# Altium PCB PCB.PcbDoc
Units mm, origin at the board's own origin, x right, y up, seen from the top; angles counter-clockwise.
Board outline 45 x 45 mm, 2 copper layers (Top Layer, Bottom Layer); 27 components, 24 nets, 97 pads, 5 vias.
Unrouted connection lines stored in the file: 42.
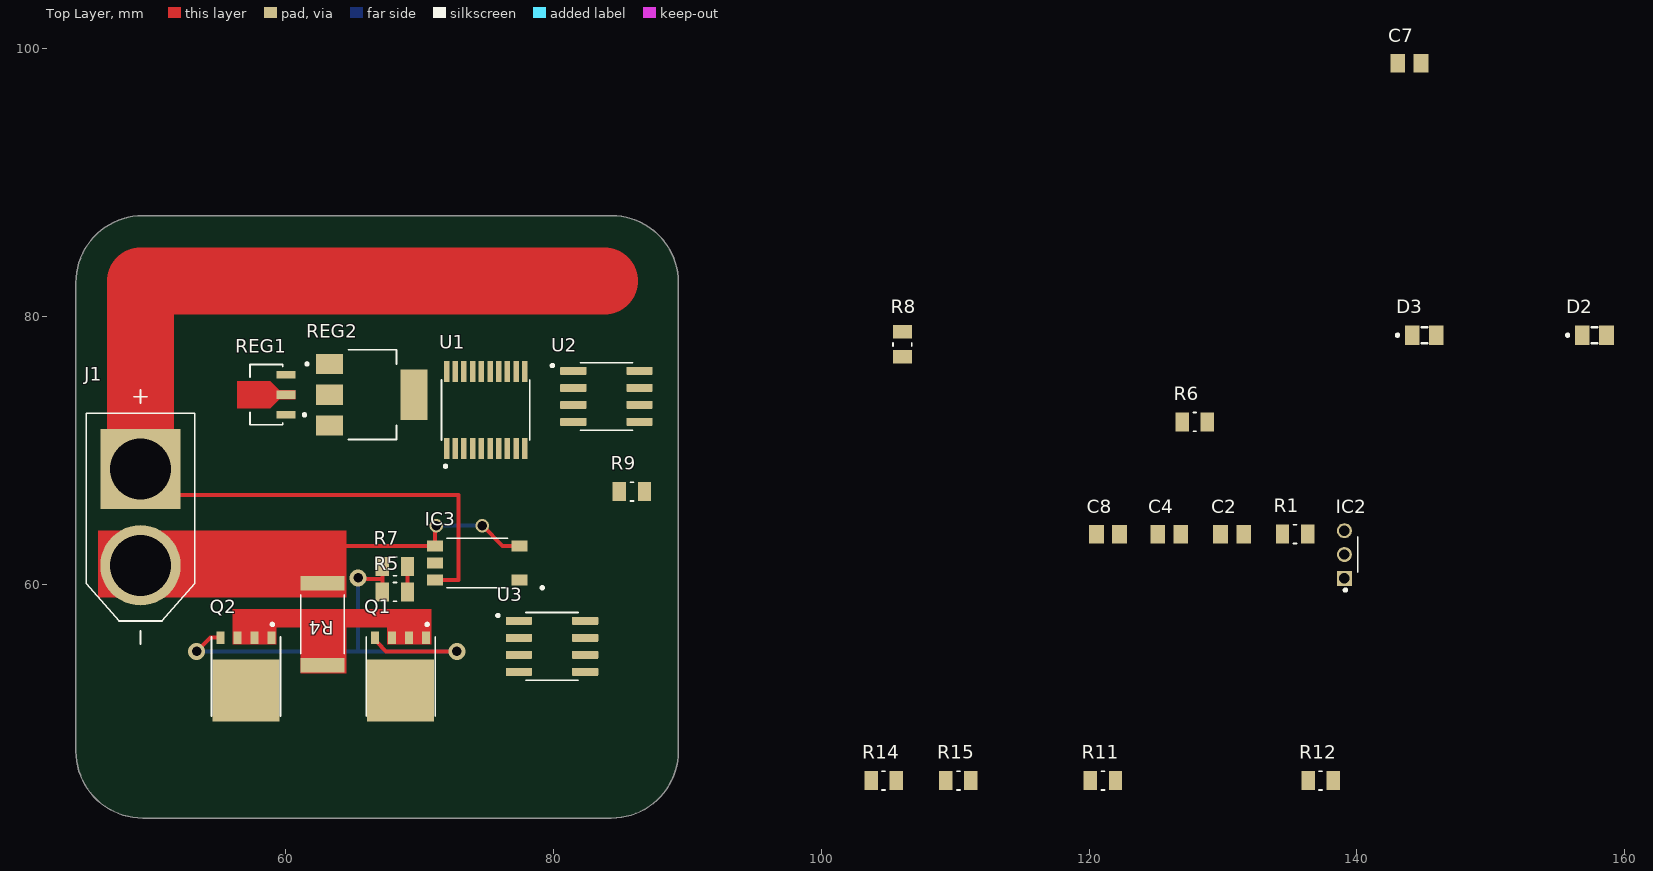
[diagram p0: Top Layer view]
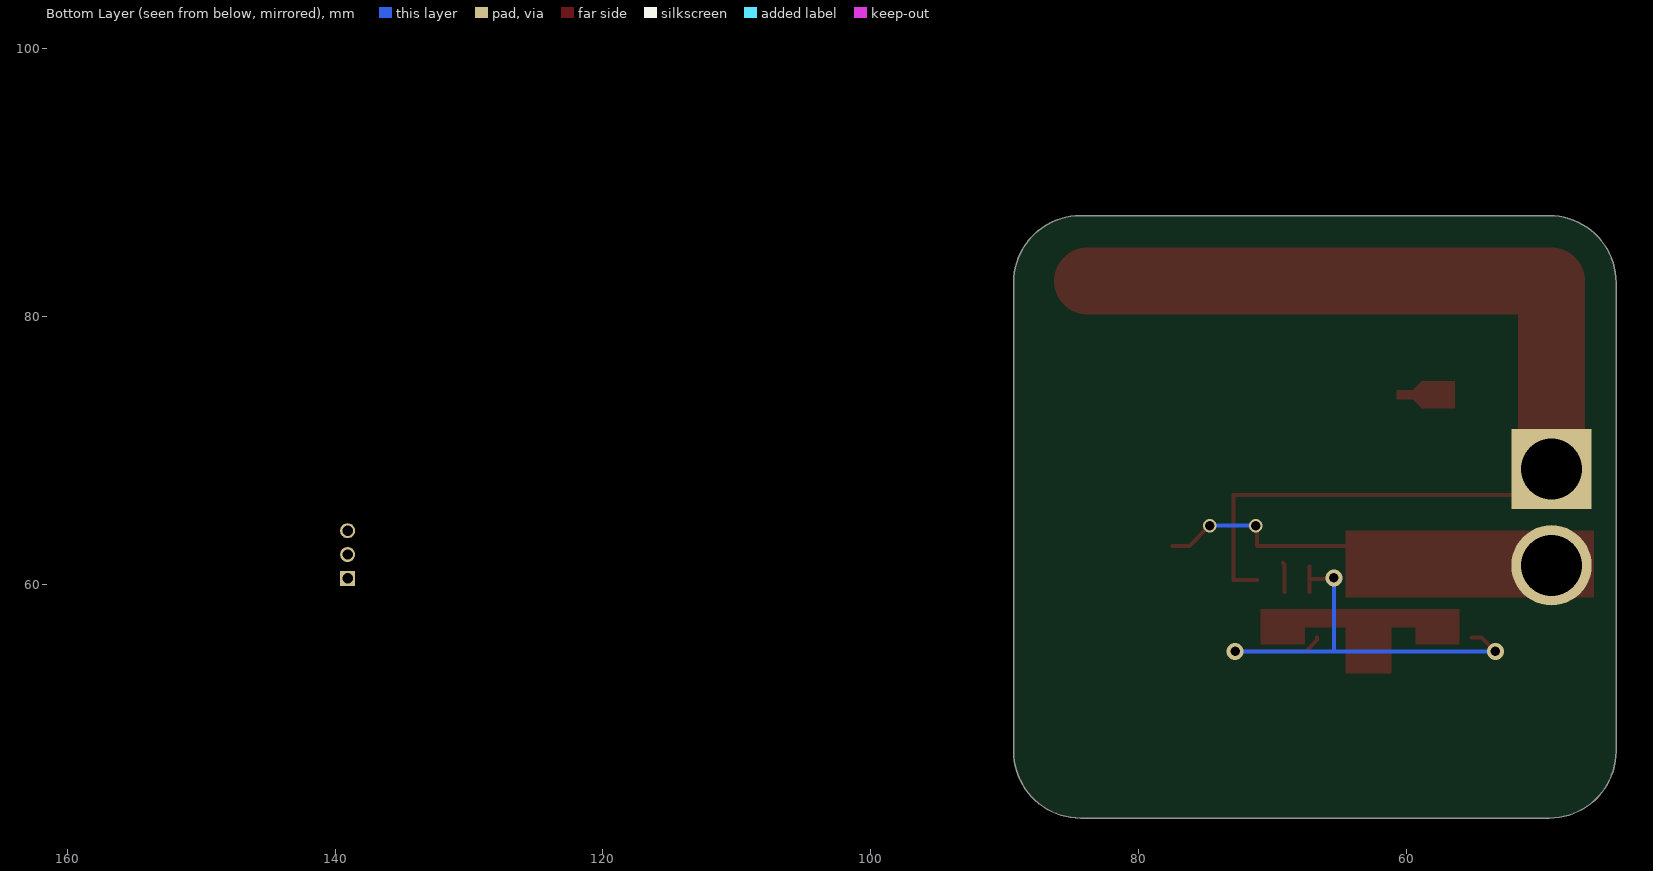
[diagram p1: Bottom Layer view, seen from below]

## Layer stack, top to bottom
Top Solder: solder mask 0.0102, Solder Resist, Dk 3.5
Top Layer: signal copper 0.0356
Dielectric 1: dielectric 0.32, FR-4, Dk 4.8
Bottom Layer: signal copper 0.0356
Bottom Solder: solder mask 0.0102, Solder Resist, Dk 3.5

## Board outline
44.323,47.545 44.323,82.545 cw(c49.323,82.545) 49.323,87.545 84.323,87.545 cw(c84.323,82.545) 89.323,82.545 89.323,47.545 cw(c84.323,47.545) 84.323,42.545 49.323,42.545 cw(c49.323,47.545)

## Design rules (kind name [scope] priority, off if disabled: settings)
Clearance [All] p1: gap=0.254 ignorepadtopadclearanceinfootprint=FALSE
PolygonConnect [All] p1: connectstyle=Relief reliefconductorwidth=0.254 reliefentries=4 polygonreliefangle="90 Angle" airgapwidth=0.254
RoutingVias [All] p1: holewidth=0.711 width=1.27 viastyle="Through Hole" minholewidth=0.711 minwidth=1.27 maxholewidth=0.711 maxwidth=1.27
SolderMaskExpansion [All] p1: expansion=0.102 istentingtop=FALSE
SupplyNets "Schematic Supply Nets" [InNet('GND')] p1: voltage=0.000
Width [All] p1: maxlimit=5 minlimit=0.254 preferedwidth=0.254
30 further rules are at their usual default settings.

## Components (designator, comment, footprint, x,y, rotation, side; value= is the part's Value field where it differs from the comment)
C2 "0.1uF" "0805 SMD CAP" 130.683,63.754 r0 top
C4 "0.22uF" "0805 SMD CAP" 125.984,63.754 r0 top
C7 "4.7nF" "0805 SMD CAP" 143.917,98.933 r0 top
C8 "100nF" "0805 SMD CAP" 121.412,63.754 r0 top
D2 "Red" "0805 SMD LED" 157.734,78.613 r0 top
D3 "Red" "0805 SMD LED" 145.034,78.613 r0 top
IC2 "US1881" UA 139.319,62.23 r90 top
IC3 "TLP152" SOIC-6 74.295,61.595 r180 top
J1 "XT60 Male" "XT60 Male Pin" 49.149,65.024 r270 top
Q1 "BSC032NE2LS" TDSON-8 68.58,53.12 r270 top
Q2 "BSC032NE2LS" TDSON-8 57.023,53.12 r270 top
R1 "10K" "0805 SMD RES" 135.382,63.754 r0 top
R4 "2512 SHUNT RESISTOR" "RES 2512 SMD" 62.738,57.023 r270 top
R5 "10R" "0805 SMD RES" 68.153,59.436 r180 top
R6 "220R" "0805 SMD RES" 127.889,72.136 r0 top
R7 "10R" "0805 SMD RES" 68.153,61.341 r180 top
R8 "500R" "0805 SMD RES" 106.045,77.932 r90 top
R9 "1K" "0805 SMD RES" 85.852,66.929 r0 top
R11 "1K" "0805 SMD RES" 121.031,45.339 r0 top
R12 "7K" "0805 SMD RES" 137.287,45.339 r0 top
R14 "10K" "0805 SMD RES" 104.648,45.339 r0 top
R15 "1K" "0805 SMD RES" 110.236,45.339 r0 top
REG1 "L78L05ABUTR SOT-89-3" SOT89-3 58.547,74.168 r180 top
REG2 "AMS1117" SOT-223 66.421,74.168 r0 top
U1 "STM8S103F3P6 TSSOP-20" TSSOP-20 74.93,73.025 r90 top
U2 "ISO1541DR" SOIC-8 83.947,74.041 r0 top
U3 "LM358 - SMD" SOIC-8 79.883,55.372 r0 top

## Footprints (in the part's own frame and the unit in brackets; to place one, negate y for a bottom-side part, rotate by r counter-clockwise, add the part's x,y. Pads: shape width x height; smd on the part's side, far side on the other; paste and mask are expansions set on the pad)
"0805 SMD CAP" [mm]
  rect 1.1x1.38 smd: 1(-0.863,0) 2(0.863,0)
  body extent -1,-0.72 1,0.72, height 1.22
"0805 SMD LED" [mm]
  rect 1.1x1.45 smd: A(0.9,0) C(-0.9,0)
  silkscreen extent -2.1,-0.6 0.2,0.6, body extent -1,-0.63 1,0.63, height 0.7
"0805 SMD RES" [mm]
  rect 1x1.42 smd: 1(-0.935,0) 2(0.935,0)
  silkscreen extent -0.12,-0.7 0.12,0.7, body extent -1,-0.63 1,0.63, height 0.6
"RES 2512 SMD" [mm]
  rect 1.07x3.27 smd: 1(-3.055,0) 2(3.055,0)
  silkscreen extent -2.2,-1.63 2.2,1.63, body extent -3.18,-1.6 3.18,1.6, height 0.65
SOIC-6 [mm]
  rect 1.2x0.8 smd: 1(-3.15,1.27) 3(-3.15,-1.27) 4(3.15,-1.27) 5(3.15,0) 6(3.15,1.27)
  silkscreen extent -4.96,-1.85 2.27,1.94, body extent -3.5,-1.85 3.5,1.85, height 2.3
SOIC-8 [mm]
  rrect25% 1.97x0.6 smd: 1(-2.47,1.905) 2(-2.47,0.635) 3(-2.47,-0.635) 4(-2.47,-1.905) 5(2.47,-1.905) 6(2.47,-0.635) 7(2.47,0.635) 8(2.47,1.905)
  silkscreen extent -4.14,-2.53 1.95,2.53, body extent -3,-2.45 3,2.45, height 1.75
SOT89-3 [mm]
  rect 1.4x0.57 smd: 1(-1.475,1.5) 3(-1.475,-1.5)
  rect 1.4x0.65 smd paste-2 mask+0: 2(-1.475,0)
  Top Layer region: 2.175,-1 -0.275,-1 -0.95,-0.325 -2.175,-0.325 -2.175,0.325 -0.95,0.325 -0.275,1 2.175,1
  silkscreen extent -2.95,-2.25 1.22,2.25, body extent -2.27,-2.25 1.83,2.25, height 1.6
SOT-223 [mm]
  rect 2x1.5 smd: 1(-3.15,2.3) 2(-3.15,0) 3(-3.15,-2.3)
  rect 2x3.8 smd: 4(3.15,0)
  silkscreen extent -4.94,-3.35 1.85,3.35, body extent -3.5,-3.23 3.5,3.22, height 1.8
TDSON-8 [mm]
  rect 0.95x0.6 smd paste-1 mask+0: 1(-2.9,1.905) 2(-2.9,0.635) 3(-2.9,-0.635) 4(-2.9,-1.905)
  rect 4.65x5 smd paste-3 mask+0: 5(1.05,0)
  silkscreen extent -3.99,-2.58 2.95,2.58, body extent -3.08,-2.58 3.08,2.58, height 1.1
TSSOP-20 [mm]
  rect 1.56x0.41 smd: 1(-2.88,2.925) 2(-2.88,2.275) 3(-2.88,1.625) 4(-2.88,0.975) 5(-2.88,0.325) 6(-2.88,-0.325) 7(-2.88,-0.975) 8(-2.88,-1.625) 9(-2.88,-2.275) 10(-2.88,-2.925) 11(2.88,-2.925) 12(2.88,-2.275) 13(2.88,-1.625) 14(2.88,-0.975) 15(2.88,-0.325) 16(2.88,0.325) 17(2.88,0.975) 18(2.88,1.625) 19(2.88,2.275) 20(2.88,2.925)
  silkscreen extent -4.3,-3.3 2.25,3.3, body extent -3.2,-3.25 3.2,3.25, height 0.53
UA [mm]
  rect 1.12x1.12 / inner round 1.12 / far side rect 1.12x1.12 hole 0.77: 1(-1.778,0.254)
  round 1.12 hole 0.77: 2(0,0.254) 3(1.778,0.254)
  silkscreen extent -2.75,-0.75 1.31,0.28, body extent -2.05,-0.93 2.05,0.57, height 4.95
"XT60 Male Pin" [mm]
  round 6 hole 4.55: N(3.6,0)
  rect 6x6 / inner round 6 / far side rect 6x6 hole 4.55: P(-3.6,0)
  silkscreen extent -9.5,-4.05 9.5,4.05, body extent -7.75,-4.05 7.75,4.05, height 16.5

## Part data
C2 C4 C7 C8: library part "CAP SMD 0805"
D2 D3: library part "LED 0805 SMD"
IC3: library part TLP152-SMD
J1: library part "XT60 Male Pin"
Q1 Q2: library part "TDSON-8 MOSFET"
R1 R5 R6 R7 R8 R9 R11 R12 R14 R15: library part "RES SMD 0805"
R4: library part "RES SMD 2512 SHUNT"
REG1: library part L78L05ABUTR
U1: library part STM8S103F3P6

## Via types
v1: diameter 1.27, hole 0.711, Top Layer to Bottom Layer, tented both sides, 3 vias
v2: diameter 1, hole 0.711, Top Layer to Bottom Layer, tented both sides, 2 vias

## Nets (pads, with @x,y where several pads share a name; then routed paths per layer and width w, separated by ;. In a path a pad name is that pad's centre, name@x,y a point inside that pad or via, vN(x,y) a via of type N, cw(c..) or ccw(c..) an arc to the next point about the centre after c; other vN are vias at no path point)
3.3V: REG2.2 U1.9 U2.1 U3.8
3S-6S: C4.1 IC3.6 J1.P R14.1 REG1.3 | length 81.4
  Top Layer w0.3: J1.P 51.098,66.675 72.898,66.675 72.898,60.325 IC3.6
  Top Layer w5: J1.P 49.149,82.677 83.82,82.677
5V: C2.1 IC2.1 R1.1 REG1.1 REG2.3
Current_ADC: Q1.1 Q1.2 Q1.3 Q2.1 Q2.2 Q2.3 R4.2 U3.3
GND: C2.2 C4.2 D2.C D3.C IC3.3 IC3.4 J1.N R4.1 R11.1 R15.2 REG1.2 REG2.1 U1.7 U2.4 U3.4 | length 17.3
  Top Layer w0.3: 62.23,62.865 IC3.4 71.145,64.233 71.247,64.335 v2(71.247,64.389) ; v2(74.676,64.389) 76.2,62.865 IC3.3
  Bottom Layer w0.3: v2(71.247,64.389) v2(74.676,64.389)
HallOut: C7.1 IC2.2
HallOut1: U1.16
HallOut2: R6.1 R8.2 U1.15
Negative: Q1.5 Q2.5
NetC7_2: C7.2 C8.2 IC2.3
NetC8_1: C8.1 R1.2
NetD2_A: D2.A R8.1
NetD3_A: D3.A R9.2
NetQ1_4: Q1.4 Q2.4 R5.2 R7.2 | length 37.5
  Top Layer w0.3: v1(53.34,54.991) 54.369,56.02 Q2.4 ; v1(65.405,60.485) 65.502,60.389 67.218,60.389 ; Q1.4 66.675,55.845 67.16,55.36 67.16,55.332 67.501,54.991 v1(72.771,54.991) ; R5.2 67.218,60.389 ; R7.2 67.218,60.389
  Bottom Layer w0.3: v1(53.34,54.991) 65.405,54.991 ; v1(65.405,60.485) 65.405,54.991 ; v1(72.771,54.991) 65.405,54.991
NetR5_1: IC3.5 R5.1 R7.1 | length 2.2
  Top Layer w0.3: R5.1 69.088,61.495 R7.1@69.188,61.595
NetR6_2: IC3.1 R6.2
NetR9_1: R9.1 U1.1
NetR11_2: R11.2 R12.2 U3.1 U3.2
NetU1_11: U1.11 U2.2
NetU1_12: U1.12 U2.3
NRST: U1.6
Opamp_ADC: R12.1 U1.19
SWIM: U1.18
Volt_ADC: R14.2 R15.1 U1.14
pads on no net: REG2.4 U1.2 U1.3 U1.4 U1.5 U1.8 U1.10 U1.13 U1.17 U1.20 U2.5 U2.6 U2.7 U2.8 U3.5 U3.6 U3.7

## Other copper
Top Layer:
  rectangle net GND: 45.974,59.008 64.516,64.008
  rectangle net Current_ADC: 61.087,53.34 64.516,57.531
  rectangle net Current_ADC: 59.055,56.769 68.199,58.166
  rectangle net Current_ADC: 56.007,55.499 59.309,58.166
  rectangle net Current_ADC: 67.564,55.499 70.866,58.166

## Silkscreen, mask and mechanical layers (free items; w line width, h text height)
Top Paste:
  lines w0.254: 57.123,52.37 68.48,52.37 ; 44.323,47.545 ccw(c49.323,47.545) 49.323,42.545 84.323,42.545 ccw(c84.323,47.545) 89.323,47.545 89.323,82.545 ccw(c84.323,82.545) 84.323,87.545 49.323,87.545 ccw(c49.323,82.545) 44.323,82.545 44.323,47.545
Top Solder:
  region: 84.074,85.217 51.562,85.217 51.562,80.137 84.074,80.137